# Altium PCB PCB1.PcbDoc (part 3 of 3)
Units mm, origin at the board's own origin, x right, y up, seen from the top; angles counter-clockwise.
Board outline 72 x 48 mm, 6 copper layers (SIG1, GND1, SIG2, PWR, GND2, SIG3), stack 0.816 mm thick; 134 components, 203 nets, 720 pads, 397 vias.
Unrouted connection lines stored in the file: 1.
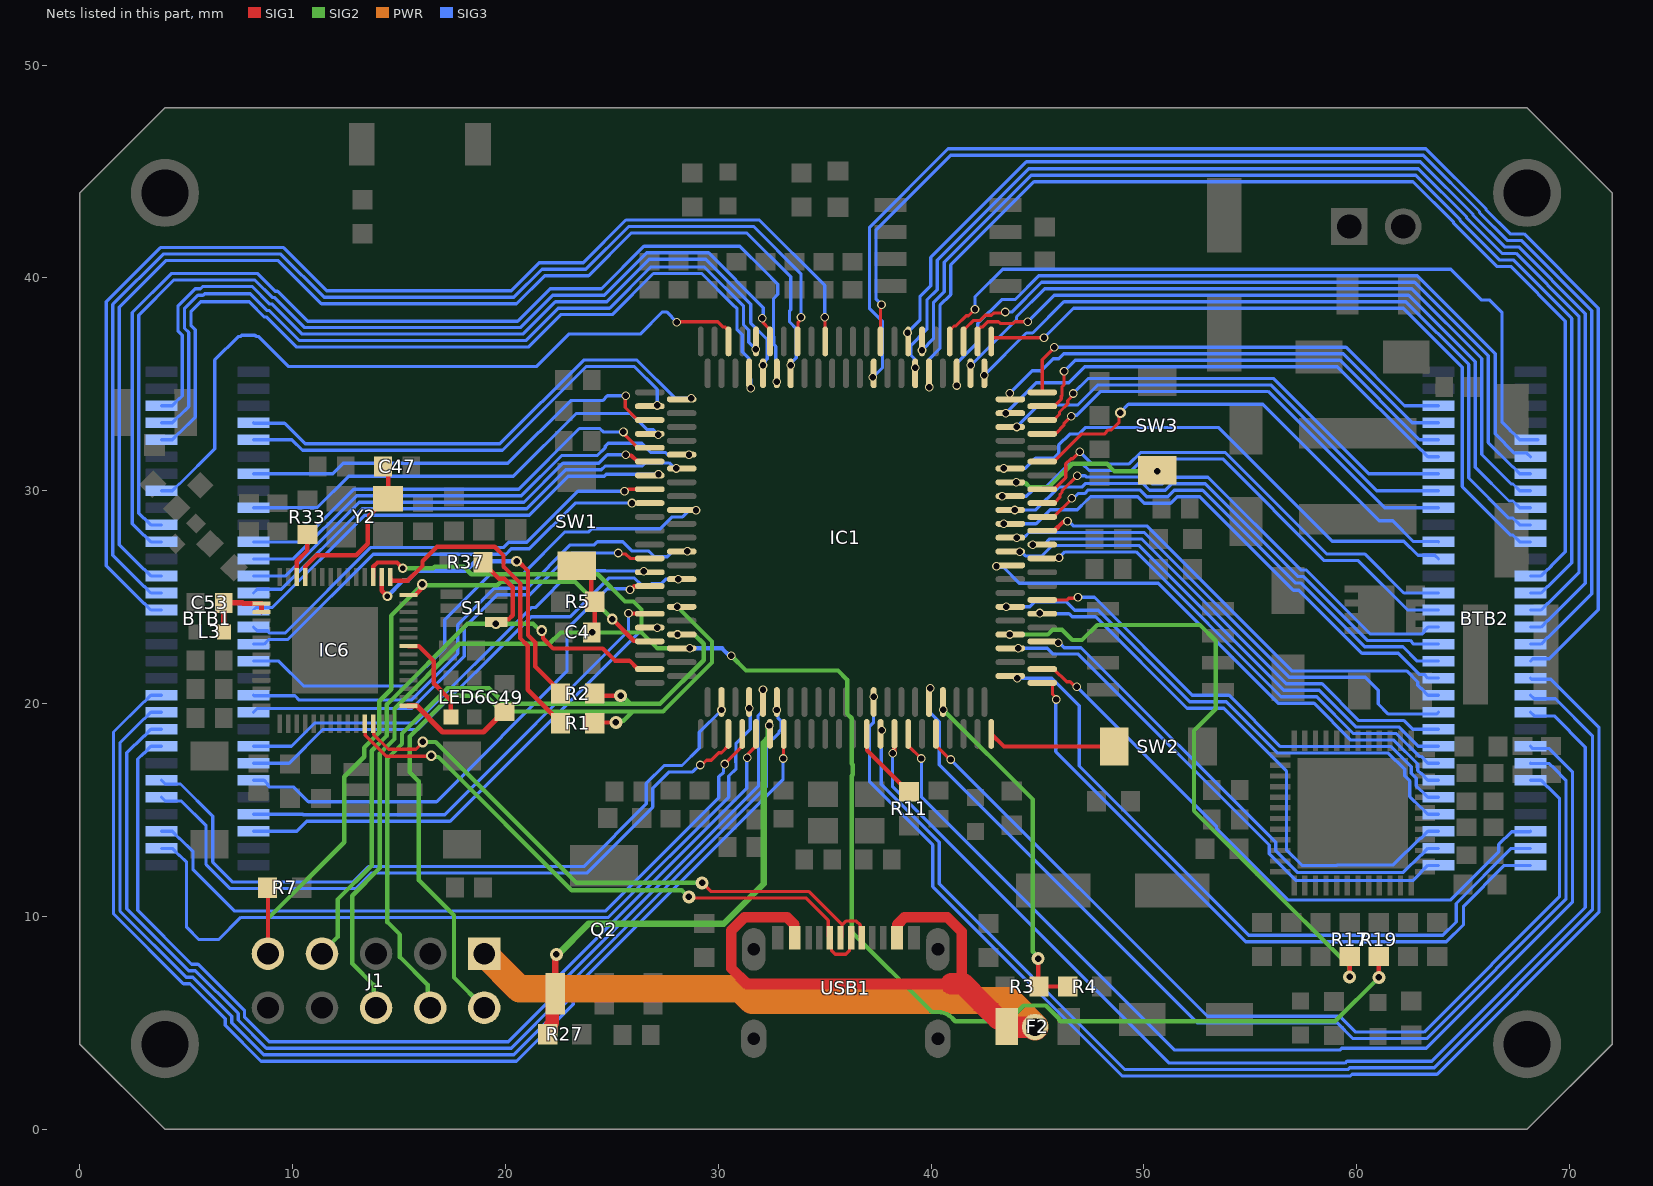
[diagram p7: the nets of this part, all layers, seen from the top]

## Via types
v1: diameter 0.406, hole 0.3, SIG1 to SIG3, 155 vias
v2: diameter 0.508, hole 0.305, SIG1 to SIG3, 119 vias
v3: diameter 0.813, hole 0.508, SIG1 to SIG3, 58 vias
v4: diameter 0.61, hole 0.305, SIG1 to SIG3, 33 vias
v5: diameter 0.914, hole 0.508, SIG1 to SIG3, 13 vias
v6: diameter 1.219, hole 0.813, SIG1 to SIG3, 5 vias
v7: diameter 1.219, hole 0.762, SIG1 to SIG3, 5 vias
v8: diameter 0.457, hole 0.254, SIG1 to SIG3, 4 vias
v9: diameter 1.2, hole 1.2, SIG1 to SIG3, 2 vias
v10: diameter 0.8, hole 0.8, SIG1 to SIG3, 2 vias
v11: diameter 0.508, hole 0.3, SIG1 to SIG3, 1 vias

## Nets (pads, with @x,y where several pads share a name; then routed paths per layer and width w, separated by ;. In a path a pad name is that pad's centre, name@x,y a point inside that pad or via, vN(x,y) a via of type N, cw(c..) or ccw(c..) an arc to the next point about the centre after c; other vN are vias at no path point) (continued)
PTB13: BTB1.43 IC1.116 | length 54.1
  SIG1 w0.203: IC1.116@33.4,35.52 v1(33.4,35.899)
  SIG3 w0.152: BTB1.43@3.84,26 3.34,26 3.019,26.321 2.995,26.321 1.854,27.463 1.854,38.633 4.041,40.819 9.32,40.819 11.354,38.786 20.52,38.786 21.842,40.108 23.904,40.108 25.911,42.115 31.343,42.115 33.401,40.056 33.401,38.511 33.35,38.46 33.35,37.931 33.661,37.62 33.661,36.673 33.659,36.671 33.659,36.255 33.4,35.996 v1(33.4,35.899)
PTB20: BTB2.1 IC1.44 | length 31.8
  SIG1 w0.152: IC1.44@45.22,20.975 45.645,20.975 45.704,20.916 45.704,20.447 45.884,20.267 v1(45.884,20.198)
  SIG3 w0.152: v1(45.884,20.198) 45.856,20.17 45.856,17.747 54.788,8.815 64.21,8.815 65.019,9.624 65.019,10.487 66.932,12.4 BTB2.1@68.16,12.4
PTB21: BTB2.2 IC1.45 | length 33.4
  SIG1 w0.203: IC1.45@43.72,21.3 44.052,21.3 v1(44.052,21.198)
  SIG3 w0.152: v1(44.052,21.198) 45.673,21.198 46.964,19.907 46.964,17.07 54.914,9.12 64.047,9.12 64.668,9.742 64.668,10.612 67.256,13.2 BTB2.2@68.16,13.2
PTB22: BTB2.49 IC1.67 | length 25.1
  SIG1 w0.203: v1(43.409,28.448) 43.411,28.45 IC1.67@43.72,28.45
  SIG3 w0.152: v1(43.409,28.448) 44.931,28.448 45.593,29.11 46.864,29.11 47.322,29.568 47.336,29.568 47.488,29.719 49.703,29.719 50.008,29.415 51.25,29.415 51.554,29.719 52.629,29.719 57.023,25.325 57.279,25.325 60.24,22.364 61.945,22.364 62.935,21.374 63.166,21.374 63.34,21.2 BTB2.49@63.84,21.2
PTB23: BTB2.47 IC1.69 | length 24
  SIG1 w0.203: IC1.69@43.72,29.1 43.722,29.102 v1(43.921,29.102)
  SIG3 w0.152: v1(43.921,29.102) 44.918,29.102 45.994,30.178 47.084,30.178 47.255,30.349 49.936,30.349 50.261,30.024 50.997,30.024 51.302,30.329 52.881,30.329 57.231,25.98 57.487,25.98 60.493,22.974 62.506,22.974 62.679,22.8 BTB2.47@63.84,22.8
PTB24: BTB2.46 IC1.70 | length 22.8
  SIG1 w0.152: IC1.70@45.22,29.425 45.262,29.467 45.822,29.467 46.052,29.697 46.052,29.826 46.149,29.922 46.149,29.997 v1(46.863,30.711)
  SIG3 w0.152: v1(46.863,30.711) 47.233,30.711 47.29,30.654 50.062,30.654 50.387,30.329 50.871,30.329 51.176,30.634 53.008,30.634 57.357,26.285 57.613,26.285 60.619,23.279 63.077,23.279 63.166,23.368 63.166,23.426 63.34,23.6 BTB2.46@63.84,23.6
PTB25: BTB2.44 IC1.72 | length 22.9
  SIG1 w0.152: IC1.72@45.22,30.075 45.262,30.117 45.822,30.117 46.33,30.625 46.33,31.264 46.576,31.511 46.66,31.511 v1(46.977,31.829)
  SIG3 w0.152: v1(46.977,31.829) 47.542,31.264 49.301,31.264 49.839,31.802 53.824,31.802 58.599,27.027 60.388,27.027 62.215,25.2 BTB2.44@63.84,25.2
PTB27: BTB2.42 IC1.75 | length 24.3
  SIG1 w0.203: v1(43.409,31.052) 43.411,31.05 IC1.75@43.72,31.05
  SIG3 w0.152: v1(43.409,31.052) 44.419,31.052 44.898,31.531 45.766,31.531 45.999,31.764 45.999,32.158 46.508,32.667 46.933,32.667 47.237,32.971 53.518,32.971 58.852,27.637 62.211,27.637 62.874,26.974 63.666,26.974 BTB2.42@63.84,26.8
PTB28: BTB2.41 IC1.76 | length 22.6
  SIG1 w0.152: IC1.76@45.22,31.375 45.765,31.375 47.057,32.667 48.134,32.667 48.33,32.864 48.474,32.864 48.829,33.218 48.829,33.604 v2(48.897,33.672)
  SIG3 w0.152: v2(48.897,33.672) 48.897,33.691 49.268,34.063 55.578,34.063 61.051,28.59 61.689,28.59 62.663,27.616 63.824,27.616 BTB2.41@63.84,27.6
PTB29: BTB2.39 IC1.80 | length 21.8
  SIG1 w0.152: IC1.80@45.22,32.675 45.815,32.675 45.878,32.739 45.896,32.739 46.24,33.082 46.24,33.159 v1(46.586,33.505)
  SIG3 w0.152: v1(46.586,33.505) 46.632,33.552 46.845,33.552 47.965,34.672 55.831,34.672 61.303,29.2 BTB2.39@63.84,29.2
PTC0: BTB2.54 IC1.62 | length 22.9
  SIG1 w0.203: IC1.62@45.22,26.825 45.232,26.837 45.994,26.837 v1(46.005,26.848)
  SIG3 w0.152: v1(46.005,26.848) 46.285,27.129 49.631,27.129 56.438,20.321 58.117,20.321 59.844,18.594 61.864,18.594 62.937,17.521 63.019,17.521 63.34,17.2 BTB2.54@63.84,17.2
PTC1: BTB2.55 IC1.61 | length 25.8
  SIG1 w0.203: v1(43.074,26.449) 43.124,26.5 IC1.61@43.72,26.5
  SIG3 w0.152: v1(43.074,26.449) 43.122,26.401 43.4,26.401 44.145,25.655 50.673,25.655 56.312,20.017 57.99,20.017 59.718,18.289 61.738,18.289 62.861,17.166 62.861,16.855 62.995,16.721 63.019,16.721 63.34,16.4 BTB2.55@63.84,16.4
PTC2: BTB2.59 IC1.50 | length 23.8
  SIG1 w0.203: IC1.50@45.22,22.925 45.235,22.91 45.864,22.91 45.913,22.861 v1(45.968,22.861)
  SIG3 w0.152: v1(45.968,22.861) 46.019,22.861 46.247,22.633 47.04,22.633 56.188,13.485 56.188,13.079 57.196,12.072 62.188,12.072 62.995,12.879 63.019,12.879 63.34,13.2 BTB2.59@63.84,13.2
PTC3: BTB2.60 IC1.49 | length 25.2
  SIG1 w0.203: IC1.49@43.72,22.6 44.087,22.6 44.089,22.602 v1(44.094,22.602)
  SIG3 w0.152: v1(44.094,22.602) 45.455,22.602 45.729,22.328 46.914,22.328 55.883,13.359 55.883,12.952 57.15,11.685 62.625,11.685 63.34,12.4 BTB2.60@63.84,12.4
PTC6: BTB1.17 IC1.141 | length 22.8
  SIG1 w0.203: v1(28.016,31.052) 28.233,31.052 28.235,31.05 IC1.141@28.28,31.05
  SIG3 w0.152: BTB1.17@8.16,25.2 8.334,25.374 9.473,25.374 13.26,29.161 20.998,29.161 22.827,30.989 24.51,30.989 24.687,31.167 26.437,31.167 26.582,31.311 27.688,31.311 27.947,31.052 v1(28.016,31.052)
PTC7: BTB1.18 IC1.140 | length 21.1
  SIG1 w0.203: v1(25.647,31.7) 25.686,31.661 25.913,31.661 26.199,31.375 IC1.140@26.78,31.375
  SIG3 w0.152: BTB1.18@8.16,26 9.668,26 13.133,29.465 20.872,29.465 22.701,31.294 24.383,31.294 24.79,31.7 v1(25.647,31.7)
PTC8: BTB2.16 IC1.98 | length 55.8
  SIG1 w0.203: IC1.98@39.25,35.52 39.25,35.695 39.252,35.697 v1(39.252,35.79)
  SIG3 w0.152: v1(39.252,35.79) 39.203,35.839 39.203,36.218 39.04,36.382 39.04,36.824 39.802,37.586 39.802,38.965 40.284,39.448 40.284,40.842 44.579,45.136 62.892,45.136 65.155,42.872 65.155,42.822 66.822,41.155 67.482,41.155 70.434,38.203 70.434,26.151 69.005,24.721 68.981,24.721 68.66,24.4 BTB2.16@68.16,24.4
PTC9: BTB2.17 IC1.97 | length 53
  SIG1 w0.152: v1(39.573,36.603) 39.575,36.605 IC1.97@39.575,37.02
  SIG3 w0.152: v1(39.573,36.603) 40.107,37.136 40.107,38.839 40.615,39.347 40.615,40.741 44.705,44.831 62.765,44.831 64.851,42.746 64.851,42.695 66.695,40.851 67.356,40.851 70.104,38.102 70.104,26.621 69.005,25.521 68.981,25.521 68.66,25.2 BTB2.17@68.16,25.2
PTC10: BTB2.25 IC1.92 | length 36.5
  SIG1 w0.203: IC1.92@41.2,35.52 41.2,34.976 41.202,34.974 v1(41.202,34.952)
  SIG3 w0.152: v1(41.202,34.952) 41.202,35.996 42.189,36.984 42.189,37.866 43.31,38.987 43.939,38.987 45.06,40.108 62.84,40.108 66.503,36.445 66.503,32.672 67.401,31.774 67.986,31.774 BTB2.25@68.16,31.6
PTC11: BTB2.23 IC1.90 | length 34.5
  SIG3 w0.152: v1(41.855,35.895) 41.872,35.895 44.012,38.034 44.012,38.17 45.34,39.498 62.586,39.498 65.867,36.218 65.867,31.708 67.253,30.321 67.339,30.321 67.66,30 BTB2.23@68.16,30
PTC12: BTB2.36 IC1.83 | length 23.2
  SIG1 w0.203: v1(43.51,33.648) 43.718,33.648 IC1.83@43.72,33.65
  SIG3 w0.152: v1(43.51,33.648) 44.941,35.079 46.467,35.079 47.217,35.829 59.087,35.829 62.995,31.921 63.019,31.921 63.34,31.6 BTB2.36@63.84,31.6
PTC13: BTB2.38 IC1.81 | length 23
  SIG1 w0.203: IC1.81@43.72,33 IC1.81@43.72,33 v1(44.018,33.002)
  SIG3 w0.152: v1(44.018,33.002) 45.055,34.038 46.9,34.038 47.839,34.977 55.957,34.977 60.934,30 BTB2.38@63.84,30
PTC14: BTB2.45 IC1.71 | length 24.8
  SIG1 w0.203: v1(43.332,29.748) 43.718,29.748 IC1.71@43.72,29.75
  SIG3 w0.152: v1(43.332,29.748) 44.478,29.748 44.741,30.011 45.224,30.011 46.458,31.244 47.13,31.244 47.416,30.959 49.427,30.959 49.966,31.497 53.698,31.497 58.473,26.722 60.077,26.722 62.399,24.4 BTB2.45@63.84,24.4
PTC15: BTB2.48 IC1.68 | length 22.7
  SIG1 w0.152: IC1.68@45.22,28.775 45.762,28.775 46.603,29.616 v1(46.603,29.643)
  SIG3 w0.152: v1(46.603,29.643) 46.672,29.643 46.901,29.873 47.21,29.873 47.382,30.044 49.809,30.044 50.134,29.719 51.123,29.719 51.428,30.024 52.755,30.024 57.104,25.675 57.361,25.675 60.367,22.669 62.171,22.669 62.84,22 BTB2.48@63.84,22
PTC16: BTB2.50 IC1.66 | length 22.3
  SIG1 w0.203: IC1.66@45.22,28.125 45.78,28.125 46.193,28.538 46.367,28.538 v1(46.406,28.576)
  SIG3 w0.152: v1(46.406,28.576) 46.444,28.576 46.671,28.349 50.138,28.349 56.947,21.541 62.337,21.541 62.861,21.017 62.861,20.855 62.995,20.721 63.019,20.721 63.34,20.4 BTB2.50@63.84,20.4
PTC17: BTB2.51 IC1.65 | length 24.2
  SIG1 w0.203: IC1.65@43.72,27.8 44.004,27.8 44.006,27.802 v1(44.018,27.802)
  SIG3 w0.152: v1(44.018,27.802) 44.067,27.851 44.406,27.851 44.598,28.043 50.01,28.043 56.817,21.236 60.401,21.236 61.011,20.626 61.011,19.983 61.485,19.509 63.749,19.509 BTB2.51@63.84,19.6
PTC18: BTB2.37 IC1.82 | length 21.5
  SIG1 w0.152: IC1.82@45.22,33.325 45.761,33.325 46.031,33.595 46.031,33.705 46.421,34.094 46.421,34.245 46.682,34.506 v1(46.682,34.575)
  SIG3 w0.152: v1(46.682,34.575) 46.688,34.575 47.395,35.282 56.083,35.282 60.565,30.8 BTB2.37@63.84,30.8
PTC19: BTB2.35 IC1.84 | length 21.7
  SIG1 w0.152: IC1.84@45.22,33.975 45.262,34.017 45.822,34.017 46.116,34.311 46.116,34.44 46.149,34.472 46.149,34.895 46.246,34.992 v1(46.246,35.612)
  SIG3 w0.152: v1(46.246,35.612) 46.768,36.134 59.214,36.134 62.944,32.404 63.836,32.404 BTB2.35@63.84,32.4
PTC20: BTB2.34 IC1.85 | length 22.6
  SIG1 w0.203: v1(43.687,34.579) 43.687,34.333 IC1.85@43.72,34.3
  SIG3 w0.152: v1(43.687,34.579) 44.754,35.646 45.17,35.646 45.734,36.21 46.003,36.21 46.232,36.439 59.372,36.439 62.611,33.2 BTB2.34@63.84,33.2
PTC21: BTB2.33 IC1.86 | length 21.5
  SIG1 w0.152: IC1.86@45.22,34.625 45.22,36.154 45.782,36.716 v1(45.782,36.744)
  SIG3 w0.152: v1(45.782,36.744) 59.498,36.744 62.242,34 BTB2.33@63.84,34
PTC23: BTB2.20 IC1.87 | length 33.9
  SIG1 w0.152: IC1.87@42.825,37.02 42.825,37.139 42.884,37.198 v1(45.303,37.198)
  SIG3 w0.152: v1(45.303,37.198) 46.689,38.584 62.179,38.584 64.952,35.811 64.952,30.198 67.228,27.921 67.339,27.921 67.66,27.6 BTB2.20@68.16,27.6
PTC24: BTB2.21 IC1.88 | length 34.7
  SIG1 w0.203: v1(42.494,35.434) 42.5,35.44 IC1.88@42.5,35.52
  SIG3 w0.152: v1(42.494,35.434) 44.475,37.416 44.766,37.416 46.239,38.889 62.306,38.889 65.257,35.937 65.257,30.604 67.14,28.721 67.339,28.721 67.66,28.4 BTB2.21@68.16,28.4
PTC25: BTB2.22 IC1.89 | length 34.3
  SIG1 w0.152: IC1.89@42.175,37.02 42.175,37.545 42.325,37.695 42.41,37.695 42.663,37.949 43.165,37.949 43.246,37.867 43.867,37.867 43.949,37.949 v1(44.545,37.949)
  SIG3 w0.152: v1(44.545,37.949) 45.79,39.194 62.432,39.194 65.562,36.064 65.562,31.112 67.152,29.521 67.339,29.521 67.66,29.2 BTB2.22@68.16,29.2
PTC26: BTB2.24 IC1.91 | length 34.2
  SIG1 w0.152: IC1.91@41.525,37.02 41.525,37.545 41.652,37.673 41.979,38 42.283,38 42.537,38.253 42.837,38.253 42.935,38.352 43.43,38.352 v1(43.479,38.401)
  SIG3 w0.152: v1(43.479,38.401) 43.784,38.401 45.187,39.803 62.713,39.803 66.171,36.344 66.171,32.265 67.315,31.121 67.339,31.121 67.66,30.8 BTB2.24@68.16,30.8
PTC27: BTB2.26 IC1.93 | length 36
  SIG1 w0.152: IC1.93@40.875,37.02 40.875,37.545 41.073,37.744 41.166,37.744 41.65,38.228 41.757,38.228 v1(42.062,38.533)
  SIG3 w0.152: v1(42.062,38.533) 42.062,39.117 43.358,40.413 64.414,40.413 65.867,38.96 66.244,38.96 66.819,38.385 66.819,33.241 67.181,32.879 67.181,32.855 67.315,32.721 67.339,32.721 67.66,32.4 BTB2.26@68.501,32.4
PTC28: BTB2.18 IC1.96 | length 52.4
  SIG3 w0.152: v1(39.903,34.876) 39.903,36.179 40.411,36.687 40.411,38.712 40.919,39.22 40.919,40.615 44.831,44.526 62.639,44.526 64.546,42.62 64.546,42.569 66.569,40.546 67.229,40.546 69.799,37.976 69.799,27.139 69.139,26.479 69.139,26.455 69.005,26.321 68.981,26.321 68.66,26 BTB2.18@68.16,26
PTC29: BTB2.15 IC1.99 | length 56.1
  SIG1 w0.152: v1(38.887,37.426) 38.887,37.142 38.925,37.104 IC1.99@38.925,37.02
  SIG3 w0.152: v1(38.887,37.426) 39.472,38.01 39.472,39.117 39.98,39.625 39.98,40.968 44.479,45.467 62.991,45.467 65.46,42.999 65.46,42.948 66.948,41.46 67.608,41.46 70.739,38.329 70.739,25.656 69.005,23.921 68.981,23.921 68.66,23.6 BTB2.15@68.16,23.6
PTC31: BTB2.14 IC1.103 | length 60.7
  SIG1 w0.152: IC1.103@37.625,37.02 37.625,38.703 v1(37.668,38.746)
  SIG3 w0.152: v1(37.668,38.746) 37.414,39 37.414,42.267 40.919,45.772 63.118,45.772 65.765,43.125 65.765,43.074 67.074,41.765 67.734,41.765 71.044,38.456 71.044,25.161 69.005,23.121 68.981,23.121 68.66,22.8 BTB2.14@68.16,22.8
PTD0: BTB1.59 IC1.8 | length 38
  SIG1 w0.203: IC1.8@31.45,19.783 IC1.8@31.45,19.882 ; IC1.8@31.45,20.08 IC1.8@31.45,19.882 ; v1(31.452,19.781) 31.452,19.88 IC1.8@31.45,19.882
  SIG3 w0.152: BTB1.59@3.84,13.2 4.34,13.2 4.661,12.879 4.685,12.879 5.019,12.544 5.019,9.494 5.594,8.919 6.53,8.919 7.569,9.958 24.84,9.958 30.493,15.611 30.493,16.6 30.836,16.943 30.836,17.219 30.825,17.23 30.825,17.672 30.836,17.683 30.836,18.137 31.496,18.797 31.496,19.737 v1(31.452,19.781)
PTD1: BTB1.58 IC1.7 | length 33.9
  SIG1 w0.152: v1(30.296,17.162) 30.296,17.174 31.125,18.004 IC1.7@31.125,18.58
  SIG3 w0.152: BTB1.58@3.84,14 4.34,14 4.661,13.679 4.685,13.679 5.324,13.039 5.324,12.189 7.25,10.263 24.713,10.263 30.023,15.572 30.023,16.562 30.247,16.786 30.247,17.113 v1(30.296,17.162)
PTD2: BTB1.34 IC1.121 | length 38.2
  SIG3 w0.152: BTB1.34@3.84,33.2 4.34,33.2 4.661,33.521 4.685,33.521 5.123,33.96 5.123,37.441 4.914,37.65 4.914,38.55 5.55,39.186 5.792,39.186 5.871,39.265 8.007,39.265 8.804,38.468 8.912,38.468 10.321,37.059 20.948,37.059 22.473,38.584 24.892,38.584 26.824,40.516 29.35,40.516 31.189,38.677 31.189,37.791 31.429,37.551 31.429,36.987 v1(31.756,36.659)
PTD3: BTB1.33 IC1.120 | length 39.7
  SIG1 w0.203: v1(32.098,35.898) 32.098,35.522 IC1.120@32.1,35.52
  SIG3 w0.152: BTB1.33@3.84,34 4.34,34 4.661,34.321 4.685,34.321 4.819,34.455 4.819,37.315 4.609,37.524 4.609,38.676 5.424,39.491 5.666,39.491 5.775,39.6 8.103,39.6 8.93,38.773 9.038,38.773 10.448,37.363 20.821,37.363 22.347,38.889 24.766,38.889 26.756,40.879 29.418,40.879 31.528,38.769 31.528,37.883 32.3,37.111 32.3,36.196 32.203,36.099 32.203,36.072 32.098,35.967 v1(32.098,35.898)
PTD4: BTB1.40 IC1.119 | length 45.8
  SIG1 w0.152: v1(32.061,38.104) 32.11,38.056 32.11,37.895 32.383,37.622 32.383,37.062 IC1.119@32.425,37.02
  SIG3 w0.152: BTB1.40@3.84,28.4 3.34,28.4 3.019,28.721 2.995,28.721 2.769,28.948 2.769,38.254 4.42,39.905 8.23,39.905 9.057,39.078 9.164,39.078 10.574,37.668 20.695,37.668 22.221,39.194 24.639,39.194 26.63,41.184 29.544,41.184 32.116,38.612 32.116,38.46 32.11,38.454 32.11,38.153 v1(32.061,38.104)
PTD8: BTB2.52 IC1.64 | length 23.1
  SIG1 w0.203: v1(44.782,27.473) IC1.64@45.06,27.473 ; IC1.64@45.218,27.473 IC1.64@45.22,27.475
  SIG3 w0.152: v1(44.782,27.473) 45.312,27.473 45.578,27.738 49.883,27.738 56.691,20.931 58.369,20.931 60.096,19.204 62.221,19.204 62.625,18.8 BTB2.52@63.84,18.8
PTD9: BTB2.53 IC1.63 | length 24.3
  SIG1 w0.203: IC1.63@43.72,27.15 43.725,27.145 v1(44.156,27.145)
  SIG3 w0.152: v1(44.156,27.145) 44.224,27.145 44.43,26.94 45.21,26.94 45.704,27.433 49.757,27.433 56.564,20.626 58.243,20.626 59.97,18.899 61.99,18.899 62.889,18 BTB2.53@63.84,18
PTD10: BTB2.56 IC1.56 | length 23
  SIG1 w0.152: IC1.56@45.22,24.875 46.391,24.875 46.467,24.951 46.855,24.951 v1(46.899,24.995)
  SIG3 w0.152: v1(46.899,24.995) 47.676,24.995 52.273,20.398 53.999,20.398 56.412,17.985 61.612,17.985 62.557,17.04 62.557,16.729 62.789,16.497 62.789,16.128 62.995,15.921 63.019,15.921 63.34,15.6 BTB2.56@63.84,15.6
PTD11: BTB2.57 IC1.55 | length 25.4
  SIG1 w0.203: v1(43.529,24.548) 43.718,24.548 IC1.55@43.72,24.55
  SIG3 w0.152: v1(43.529,24.548) 44.636,24.548 44.878,24.79 46.349,24.79 46.753,24.387 47.853,24.387 52.147,20.093 53.873,20.093 56.286,17.68 61.485,17.68 62.252,16.913 62.252,16.603 62.484,16.371 62.484,15.633 62.995,15.121 63.019,15.121 63.34,14.8 BTB2.57@63.84,14.8
PTD12: BTB2.58 IC1.54 | length 26.6
  SIG1 w0.203: v1(45.099,24.257) 45.131,24.225 IC1.54@45.22,24.225
  SIG3 w0.152: v1(45.099,24.257) 45.129,24.227 46.482,24.227 46.627,24.082 47.727,24.082 52.021,19.788 53.746,19.788 56.693,16.842 56.693,13.133 57.429,12.397 59.07,12.397 59.095,12.422 61.718,12.422 62.975,13.679 63.019,13.679 63.34,14 BTB2.58@63.84,14
PTD15: BTB2.6 IC1.35 | length 44.4
  SIG1 w0.152: IC1.35@40.225,18.58 40.225,18.055 40.905,17.375 v1(40.919,17.375)
  SIG3 w0.152: v1(40.919,17.375) 52.984,5.31 59.209,5.31 59.949,4.57 63.163,4.57 69.52,10.927 69.52,15.563 69.005,16.079 68.981,16.079 68.66,16.4 BTB2.6@68.16,16.4
PTD16: BTB2.7 IC1.34 | length 49.5
  SIG1 w0.203: IC1.34@39.9,20.08 39.9,20.667 v1(39.959,20.726)
  SIG3 w0.152: v1(39.959,20.726) 39.952,20.719 39.952,19.569 40.397,19.124 40.397,18.572 40.394,18.57 40.394,17.882 40.386,17.873 40.386,17.122 52.503,5.005 59.082,5.005 59.823,4.265 63.289,4.265 69.825,10.801 69.825,16.41 69.278,16.956 69.049,17.185 68.175,17.185 BTB2.7@68.16,17.2
PTD17: BTB2.8 IC1.31 | length 50.2
  SIG1 w0.152: IC1.31@38.925,18.58 38.925,18.03 39.532,17.424 v1(39.542,17.424)
  SIG3 w0.152: v1(39.542,17.424) 39.542,15.628 51.446,3.724 59.195,3.724 59.283,3.811 63.267,3.811 70.129,10.674 70.129,16.81 69.049,17.89 68.27,17.89 BTB2.8@68.16,18
PTD20: BTB1.45 IC1.111 | length 56.8
  SIG1 w0.152: v1(35.001,38.152) 35.013,38.14 35.013,37.032 IC1.111@35.025,37.02
  SIG3 w0.152: BTB1.45@3.84,24.4 3.34,24.4 3.019,24.721 2.995,24.721 1.245,26.472 1.245,38.885 3.788,41.429 9.575,41.429 11.609,39.395 20.267,39.395 21.589,40.718 23.652,40.718 25.658,42.724 31.929,42.724 35.001,39.652 v1(35.001,38.152)
PTD21: BTB1.44 IC1.115 | length 54.5
  SIG1 w0.152: IC1.115@33.725,37.02 33.749,37.044 33.749,37.922 33.884,38.056 v1(33.884,38.152)
  SIG3 w0.152: BTB1.44@3.84,25.2 3.34,25.2 3.019,25.521 2.995,25.521 1.549,26.967 1.549,38.759 3.915,41.124 9.449,41.124 11.482,39.091 20.393,39.091 21.716,40.413 23.778,40.413 25.785,42.419 31.662,42.419 33.884,40.198 v1(33.884,38.152)
PTD22: BTB1.41 IC1.118 | length 51
  SIG1 w0.203: v1(32.748,35.12) 32.75,35.122 IC1.118@32.75,35.52
  SIG3 w0.152: BTB1.41@3.84,27.6 3.34,27.6 3.019,27.921 2.995,27.921 2.464,28.453 2.464,38.38 4.293,40.21 8.356,40.21 9.183,39.383 9.291,39.383 10.7,37.973 20.569,37.973 22.094,39.498 24.513,39.498 26.504,41.489 31.018,41.489 32.17,40.337 32.791,39.715 32.791,39.231 32.594,39.034 32.594,37.248 32.605,37.237 32.605,36.881 32.699,36.786 32.699,35.169 v1(32.748,35.12)
PTD23: BTB1.35 IC1.122 | length 40.7
  SIG1 w0.203: IC1.122@31.45,35.52 31.45,34.939 31.521,34.868 v1(31.521,34.813)
  SIG3 w0.152: BTB1.35@3.84,32.4 4.34,32.4 4.661,32.721 4.685,32.721 5.428,33.465 5.428,37.567 5.219,37.777 5.219,38.423 5.677,38.881 7.96,38.881 8.678,38.163 8.786,38.163 10.195,36.754 21.074,36.754 22.599,38.279 25.018,38.279 26.951,40.212 29.219,40.212 30.661,38.769 30.665,38.769 30.884,38.551 30.884,37.571 31.124,37.331 31.124,36.537 31.448,36.213 31.448,35.321 31.521,35.248 v1(31.521,34.813)
PTD24: BTB1.38 IC1.125 | length 34.7
  SIG1 w0.152: v1(28.046,37.928) 28.067,37.949 29.978,37.949 30.231,37.696 30.325,37.696 30.475,37.545 IC1.125@30.475,37.02
  SIG3 w0.152: BTB1.38@3.84,30 4.34,30 4.661,30.321 4.685,30.321 6.343,31.979 6.343,36.153 7.439,37.249 7.547,37.249 7.612,37.314 8.234,37.314 8.299,37.249 8.407,37.249 9.816,35.839 21.453,35.839 22.978,37.365 26.337,37.365 27.379,38.406 27.568,38.406 v1(28.046,37.928)
PTD26: BTB1.27 IC1.131 | length 23.8
  SIG1 w0.203: IC1.131@28.28,34.3 28.692,34.3 28.727,34.335 v1(28.727,34.353)
  SIG3 w0.152: BTB1.27@8.16,33.2 8.181,33.179 9.621,33.179 10.591,32.209 19.736,32.209 23.673,36.146 26.179,36.146 27.972,34.353 v1(28.727,34.353)
PTD27: BTB1.26 IC1.132 | length 22.4
  SIG1 w0.152: IC1.132@26.78,33.975 27.141,33.975 27.127,33.989 v1(27.127,34.012)
  SIG3 w0.152: BTB1.26@8.16,32.4 9.969,32.4 10.465,31.904 19.862,31.904 23.799,35.841 26.053,35.841 27.127,34.766 v1(27.127,34.012)
PTD28: BTB1.24 IC1.134 | length 21
  SIG1 w0.152: v1(25.643,34.469) 25.629,34.454 25.629,33.916 26.178,33.367 26.738,33.367 IC1.134@26.78,33.325
  SIG3 w0.152: BTB1.24@8.16,30.8 11.882,30.8 12.376,31.294 20.115,31.294 23.061,34.241 24.561,34.241 24.79,34.469 v1(25.643,34.469)
PTD29: BTB1.22 IC1.136 | length 21.7
  SIG1 w0.203: IC1.136@26.78,32.675 26.815,32.64 v1(27.178,32.64)
  SIG3 w0.152: BTB1.22@8.16,29.2 11.144,29.2 12.628,30.685 20.367,30.685 23.313,33.631 25.892,33.631 26.654,32.869 26.949,32.869 v1(27.178,32.64)
PTD30: BTB1.20 IC1.138 | length 21.2
  SIG1 w0.152: v1(25.543,32.767) 25.543,32.702 26.22,32.025 IC1.138@26.78,32.025
  SIG3 w0.152: BTB1.20@8.16,27.6 10.406,27.6 12.881,30.075 20.62,30.075 23.473,32.929 24.425,32.929 24.586,32.767 v1(25.543,32.767)
PTD31: BTB1.19 IC1.139 | length 23
  SIG3 w0.152: BTB1.19@8.16,26.8 10.037,26.8 13.007,29.77 20.746,29.77 22.634,31.659 24.317,31.659 24.689,32.031 24.689,32.098 24.825,32.234 26.399,32.234 26.831,31.802 27.525,31.802 27.625,31.702 v1(28.626,31.702)
PTE1: BTB1.4 IC1.162 | length 23
  SIG1 w0.203: v1(25.781,24.242) 25.789,24.233 26.772,24.233 IC1.162@26.78,24.225
  SIG3 w0.152: BTB1.4@8.16,14.8 10.475,14.8 10.491,14.784 17.144,14.784 25.781,23.421 v1(25.781,24.242)
PTE2: BTB1.13 IC1.147 | length 25.5
  SIG3 w0.152: BTB1.13@8.16,22 9.345,22 10.516,20.829 15.367,20.829 17.145,22.607 17.145,23.952 19.3,26.107 20.835,26.107 22.796,28.068 23.915,28.068 24.067,28.221 27.28,28.221 27.832,28.773 28.321,28.773 28.581,29.033 28.904,29.033 v1(28.952,29.082)
PTE3: BTB2.11 IC1.27 | length 57.9
  SIG1 w0.203: IC1.27@37.625,18.58 37.625,18.722 37.66,18.757 v1(37.678,18.757)
  SIG3 w0.152: v1(37.678,18.757) 37.657,18.737 37.657,16.217 40.386,13.488 40.386,11.533 49.11,2.809 59.574,2.809 59.662,2.897 63.645,2.897 71.069,10.321 71.069,18.493 69.336,20.226 68.334,20.226 BTB2.11@68.16,20.4
PTE4: BTB1.50 IC1.13 | length 54.1
  SIG1 w0.152: v1(33.045,17.426) 33.06,17.441 33.06,18.565 IC1.13@33.075,18.58
  SIG3 w0.152: BTB1.50@3.84,20.4 3.34,20.4 3.019,20.079 2.995,20.079 1.584,18.668 1.584,10.129 4.869,6.845 5.178,6.845 6.83,5.193 6.83,4.884 8.514,3.199 12.029,3.199 12.03,3.2 20.52,3.2 23.19,5.871 23.19,6.584 33.045,16.44 v1(33.045,17.426)
PTE5: BTB1.51 IC1.12 | length 53.8
  SIG1 w0.203: IC1.12@32.75,20.08 32.752,20.078 v1(32.752,19.702)
  SIG3 w0.152: BTB1.51@3.84,19.6 3.34,19.6 3.019,19.279 2.995,19.279 1.889,18.172 1.889,10.256 4.995,7.149 5.305,7.149 7.134,5.32 7.134,5.01 8.641,3.504 11.903,3.504 11.904,3.505 20.393,3.505 22.885,5.997 22.885,6.711 32.261,16.086 32.261,18.041 32.855,18.635 32.855,18.703 32.958,18.806 32.958,19.18 32.801,19.338 32.801,19.653 v1(32.752,19.702)
PTE6: BTB1.14 IC1.146 | length 21.4
  SIG1 w0.152: v1(25.945,29.425) IC1.146@26.78,29.425
  SIG3 w0.152: BTB1.14@8.16,22.8 8.66,22.8 8.874,23.014 9.767,23.014 13.778,27.025 20.026,27.025 20.277,27.275 21.126,27.275 23.276,29.425 v1(25.945,29.425)
PTE7: BTB2.13 IC1.104 | length 65
  SIG1 w0.203: v1(37.256,35.333) 37.3,35.377 IC1.104@37.3,35.52
  SIG3 w0.152: v1(37.256,35.333) 37.719,35.796 37.719,37.941 37.109,38.551 37.109,42.393 40.793,46.077 63.244,46.077 66.07,43.251 66.07,43.2 67.2,42.07 67.861,42.07 71.349,38.583 71.349,24.411 69.049,22.112 68.272,22.112 BTB2.13@68.16,22
PTE8: BTB2.3 IC1.46 | length 29
  SIG1 w0.152: IC1.46@45.22,21.625 45.768,21.625 46.363,21.03 46.527,21.03 46.77,20.787 v1(46.839,20.787)
  SIG3 w0.152: v1(46.839,20.787) 53.41,14.215 53.41,14.132 56.771,10.771 64.396,10.771 66.675,13.05 66.675,13.387 67.271,13.983 68.143,13.983 BTB2.3@68.16,14
PTE10: BTB1.52 IC1.10 | length 52.7
  SIG1 w0.203: v1(32.098,20.652) 32.098,20.082 IC1.10@32.1,20.08
  SIG3 w0.152: BTB1.52@3.84,18.8 3.34,18.8 3.019,18.479 2.995,18.479 2.21,17.693 2.21,10.366 5.122,7.454 5.431,7.454 7.439,5.446 7.439,5.137 8.767,3.809 11.777,3.809 11.778,3.81 20.267,3.81 22.581,6.124 22.581,6.837 31.892,16.148 31.892,17.892 31.864,17.92 31.864,19.439 32.098,19.673 v1(32.098,20.652)
PTE11: BTB1.53 IC1.9 | length 47.9
  SIG1 w0.152: v1(31.358,17.451) 31.407,17.5 31.407,17.652 31.775,18.02 IC1.9@31.775,18.58
  SIG3 w0.152: BTB1.53@3.84,18 3.34,18 3.019,17.679 2.995,17.679 2.718,17.401 2.718,10.289 5.248,7.759 5.557,7.759 7.744,5.572 7.744,5.263 8.893,4.114 10.874,4.114 10.875,4.115 20.141,4.115 22.276,6.25 22.276,6.963 31.337,16.025 31.337,17.43 v1(31.358,17.451)
PTE12: BTB2.10 IC1.29 | length 54.3
  SIG1 w0.203: v1(38.191,17.666) 38.191,17.721 38.26,17.79 38.26,18.565 IC1.29@38.275,18.58
  SIG3 w0.152: v1(38.191,17.666) 38.182,17.658 38.182,16.123 51.191,3.114 59.448,3.114 59.535,3.202 63.519,3.202 70.739,10.422 70.739,17.959 69.272,19.426 68.334,19.426 BTB2.10@68.16,19.6
PTE14: BTB2.12 IC1.26 | length 61.5
  SIG1 w0.203: v1(37.298,20.321) 37.298,20.082 IC1.26@37.3,20.08
  SIG3 w0.152: v1(37.298,20.321) 37.298,19.132 37.109,18.943 37.109,16.334 40.081,13.362 40.081,11.407 48.983,2.505 59.7,2.505 59.788,2.592 63.772,2.592 71.374,10.195 71.374,18.899 69.121,21.152 68.208,21.152 BTB2.12@68.16,21.2
PTE15: BTB1.56 IC1.5 | length 33.3
  SIG1 w0.152: v1(29.149,17.118) 29.218,17.118 29.447,17.347 29.673,17.347 30.022,17.696 30.151,17.696 30.475,18.02 IC1.5@30.475,18.58
  SIG3 w0.152: BTB1.56@3.84,15.6 4.014,15.426 4.768,15.426 5.933,14.261 5.933,12.441 7.063,11.312 12.96,11.312 13.689,12.041 23.825,12.041 26.924,15.14 26.924,16.029 27.686,16.791 28.793,16.791 29.121,17.118 v1(29.149,17.118)
PTE16: BTB1.55 IC1.4 | length 34
  SIG1 w0.203: IC1.4@30.148,19.839 30.148,19.703 v1(30.15,19.701) ; IC1.4@30.148,20.078 IC1.4@30.15,20.08
  SIG3 w0.152: BTB1.55@3.84,16.4 4.014,16.226 4.73,16.226 6.248,14.708 6.248,12.557 7.189,11.617 12.834,11.617 13.563,12.346 23.673,12.346 26.619,15.292 26.619,16.254 27.461,17.096 28.296,17.096 29.108,17.908 29.108,18.659 v1(30.15,19.701)
PTE17: BTB1.16 IC1.142 | length 22.1
  SIG1 w0.152: IC1.142@26.78,30.725 27.066,30.725 27.119,30.778 v1(27.188,30.778)
  SIG3 w0.152: BTB1.16@8.16,24.4 8.279,24.519 9.049,24.519 13.386,28.856 21.125,28.856 22.953,30.685 24.636,30.685 24.734,30.783 27.183,30.783 v1(27.188,30.778)
PTE18: BTB1.15 IC1.144 | length 21.5
  SIG1 w0.152: v1(25.594,29.984) 25.662,29.984 25.753,30.075 IC1.144@26.78,30.075
  SIG3 w0.152: BTB1.15@8.16,23.6 8.334,23.426 8.834,23.426 8.834,23.408 8.923,23.319 9.641,23.319 13.654,27.332 19.902,27.332 20.151,27.58 21,27.58 23.404,29.984 v1(25.594,29.984)
PTE21: BTB1.11 IC1.153 | length 25
  SIG1 w0.203: IC1.153@28.28,27.15 28.542,27.15 v1(28.55,27.158)
  SIG3 w0.152: BTB1.11@8.16,20.4 8.188,20.372 10.111,20.372 10.314,20.169 15.569,20.169 17.755,22.355 17.755,23.7 19.482,25.427 21.017,25.427 23.049,27.459 24.167,27.459 24.32,27.611 25.515,27.611 25.958,27.168 26.735,27.168 26.837,27.066 27.001,26.902 27.6,26.902 27.856,27.158 v1(28.55,27.158)
PTE22: BTB1.10 IC1.154 | length 22.4
  SIG1 w0.152: v1(25.295,27.078) 25.343,27.029 25.656,27.029 25.861,26.825 IC1.154@26.78,26.825
  SIG3 w0.152: BTB1.10@8.16,19.6 8.334,19.774 15.605,19.774 18.059,22.229 18.059,23.573 19.608,25.122 21.143,25.122 23.099,27.078 v1@25.131,27.078
PTE23: BTB1.8 IC1.156 | length 22.1
  SIG1 w0.203: v1(26.49,26.228) 26.543,26.175 IC1.156@26.78,26.175
  SIG3 w0.152: BTB1.8@8.16,18 9.947,18 11.038,19.091 15.784,19.091 21.205,24.512 21.396,24.512 23.123,26.24 24.702,26.24 24.714,26.228 v1(26.49,26.228)
PTE24: BTB1.7 IC1.157 | length 24
  SIG1 w0.203: v1(28.118,25.852) 28.124,25.852 28.126,25.85 IC1.157@28.28,25.85
  SIG3 w0.152: BTB1.7@8.16,17.2 9.833,17.2 11.419,18.786 15.91,18.786 21.205,24.081 23.038,24.081 24.857,25.899 26.064,25.899 26.374,25.589 26.816,25.589 26.867,25.64 27.323,25.64 27.535,25.852 v1(28.118,25.852)
PTE25: BTB1.6 IC1.158 | length 24.5
  SIG1 w0.203: v1(25.85,25.359) 25.905,25.359 26.056,25.51 26.765,25.51 IC1.158@26.78,25.525
  SIG3 w0.152: BTB1.6@8.16,16.4 8.66,16.4 8.834,16.226 8.834,16.168 8.923,16.079 10.059,16.079 10.743,15.394 16.764,15.394 22.885,21.515 22.885,23.496 24.79,25.401 25.808,25.401 v1(25.85,25.359)
PTE26: BTB1.3 IC1.164 | length 22.9
  SIG3 w0.152: BTB1.3@8.16,14 10.189,14 10.668,14.479 17.399,14.479 26.493,23.573 v1(27.127,23.573)
RESET: C4.2 IC1.167 IC6.45 J1.6 R5.1 R19.1 SW1.2 | length 99
  SIG1 w0.203: IC6.45@13.789,25.956 13.79,25.957 13.79,26.442 13.984,26.635 14.905,26.635 15.171,26.368 v8(15.171,26.367) ; SW1.2@23.445,26.476 23.455,26.476 24.028,25.903 24.028,24.957 R5.1@24.193,24.792 24.193,23.484 C4.2@24.053,23.344 v2(24.079,23.344) ; IC1.167@28.28,22.6 28.663,22.6 v1(28.665,22.598) ; v4(61.036,7.139) R19.1@61.036,8.041
  SIG2 w0.203: J1.6@13.919,5.716 13.805,5.831 13.805,6.786 12.799,7.792 12.799,10.976 14.097,12.275 14.097,17.654 14.783,18.34 14.783,19.763 17.831,22.811 22.061,22.811 22.594,23.344 v2(24.079,23.344) 26.392,23.344 ; v8(15.171,26.367) 16.6,26.367 16.674,26.441 18.034,26.441 18.393,26.081 24.337,26.081 25.618,24.8 26.012,24.8 26.392,24.42 26.392,23.344 ; v1(28.665,22.598) 27.138,22.598 26.392,23.344 ; v1(30.607,22.252) 31.302,21.557 35.624,21.557 36.063,21.117 36.063,19.521 36.271,19.313 36.271,17.175 36.318,17.128 36.318,16.665 36.271,16.617 36.271,9.272 39.988,5.556 40.032,5.511 40.317,5.511 cw(c40.317,4.556) 41.066,5.149 41.134,5.081 43.612,5.081 44.348,5.818 45.383,5.818 46.007,5.194 46.007,5.141 46.067,5.081 58.979,5.081 v4(61.036,7.139)
  SIG3 w0.203: v1(28.665,22.598) 30.178,22.598 30.525,22.252 v1(30.607,22.252)
SW0_PTB19: IC1.43 SW2.1 | length 5.5
  SIG1 w0.203: IC1.43@42.825,18.58 43.42,17.985 SW2.1@48.039,17.985
SW1_PTB26: IC1.73 SW3.1 | length 7.7
  SIG1 w0.203: IC1.73@43.72,30.4 43.722,30.398 v1(43.993,30.398) ; SW3.1@50.622,30.819 50.622,30.907 v2(50.629,30.913)
  SIG2 w0.203: v1(43.993,30.398) 44.032,30.359 44.442,30.359 44.625,30.177 45.538,30.177 46.632,31.27 48.259,31.27 48.616,30.913 v2(50.629,30.913)
SWD_TDI: IC6.44 R2.2 | length 14.8
  SIG1 w0.203: IC6.44@14.189,25.956 14.189,25.31 v8(14.453,25.046) ; v2(20.519,26.691) 20.6,26.691 21.057,26.234 21.057,23.215 21.4,22.872 21.4,21.743 22.593,20.55 R2.2@22.593,20.525
  SIG3 w0.203: v8(14.453,25.046) 15.189,25.782 15.413,25.782 15.871,26.24 18.136,26.24 18.591,26.695 20.515,26.695 v2(20.519,26.691)
SWD_TDO: IC6.43 R1.2 | length 15.4
  SIG1 w0.203: IC6.43@14.589,25.956 14.589,25.784 14.59,25.782 15.413,25.782 16.1,26.469 16.1,26.688 16.787,27.375 19.498,27.375 19.909,26.963 19.909,26.438 20.701,25.646 20.701,23.068 21.044,22.725 21.044,20.651 22.593,19.102 R1.2@22.593,19.077
TCK/CLK: IC1.166 IC6.42 J1.9 R7.2 | length 36.3
  SIG1 w0.203: R7.2@8.827,11.355 8.839,11.343 J1.9@8.839,8.256 ; IC6.42@15.439,25.106 15.761,25.106 16.034,25.379 16.034,25.541 v2(16.093,25.599) ; v2(25.018,23.973) 26.032,22.959 26.131,22.959 26.151,22.94 26.765,22.94 IC1.166@26.78,22.925
  SIG2 w0.203: J1.9@8.839,8.256 8.839,9.907 12.421,13.489 12.421,16.562 13.36,17.502 13.36,17.934 14.072,18.645 14.072,20.118 14.63,20.677 14.63,24.137 v2(16.093,25.599) ; v2@16.159,25.533 16.187,25.561 19.619,25.561 19.783,25.726 23.265,25.726 v2(25.018,23.973)
TDI: IC1.165 J1.4 R2.1 | length 34.5
  SIG1 w0.203: R2.1@24.193,20.474 24.295,20.372 v4(25.405,20.372) ; v1(28.082,23.248) 28.278,23.248 IC1.165@28.28,23.25
  SIG2 w0.203: J1.4@16.459,5.716 16.345,5.831 16.345,6.786 15.04,8.091 15.04,9.147 14.453,9.735 14.453,17.426 15.138,18.112 15.138,18.594 17.272,20.728 19.228,20.728 19.964,19.991 25.872,19.991 ; v4(25.405,20.372) 25.491,20.372 25.872,19.991 ; v1(28.082,23.248) 28.086,23.252 28.873,23.252 29.312,22.813 29.312,22.043 27.259,19.991 25.872,19.991
TDO: IC1.161 J1.2 R1.1 | length 36
  SIG1 w0.203: R1.1@24.193,19.077 24.235,19.118 v4(25.191,19.118) ; v1(28.076,24.552) 28.078,24.55 IC1.161@28.28,24.55
  SIG2 w0.203: J1.2@18.999,5.716 17.58,7.136 17.58,10.057 15.927,11.709 15.927,16.347 15.501,16.773 15.501,18.454 17.419,20.372 19.081,20.372 19.817,19.636 25.984,19.636 ; v4(25.191,19.118) 25.269,19.196 25.544,19.196 25.984,19.636 ; v1@28.082,24.546 29.706,22.922 29.706,21.935 27.407,19.636 25.984,19.636
TMS/DIO: IC1.170 J1.7 R37.2 S1.4 | length 32.1
  SIG1 w0.203: R37.2@18.942,26.646 18.942,26.621 19.693,25.87 19.943,25.87 20.346,25.467 20.346,24.157 20.149,23.96 19.69,23.96 S1.4@19.567,23.837 19.567,23.772 v2(19.549,23.754) ; v2(21.702,23.432) 21.761,23.373 21.761,23.073 22.238,22.595 24.574,22.595 25.145,22.023 25.822,22.023 26.22,21.625 IC1.170@26.78,21.625
  SIG2 w0.203: J1.7@11.379,8.256 11.379,8.299 12.114,9.034 12.114,10.795 13.716,12.397 13.716,17.787 14.427,18.498 14.427,19.966 18.215,23.754 v2@19.583,23.754 ; v2@19.632,23.803 19.681,23.754 21.297,23.754 21.62,23.432 v2(21.702,23.432)
USB_DN: IC6.25 USB1.5 USB1.7 | length 29
  SIG1 w0.152: IC6.25@13.39,19.054 13.413,19.032 13.413,18.517 14.403,17.527 16.485,17.527 v2(16.51,17.553) ; v4(28.613,10.923) 28.664,10.873 34.112,10.873 35.168,9.817 35.168,9.08 USB1.5@35.242,9.006 35.316,8.932 35.316,8.409 35.497,8.227 35.986,8.227 36.168,8.409 36.168,8.932 USB1.7@36.193,8.957
  SIG1 w0.203: IC6.25@13.389,19.056 IC6.25@13.39,19.054 ; USB1.7@36.193,8.957 USB1.7@36.242,9.006
  SIG2 w0.203: v2(16.51,17.553) 16.568,17.494 16.848,17.494 23.114,11.228 28.29,11.228 28.595,10.923 v4(28.613,10.923)
USB_DP: IC6.26 USB1.6 USB1.8 | length 28.8
  SIG1 w0.152: IC6.26@13.789,19.056 13.813,19.032 13.813,18.548 14.503,17.858 15.797,17.858 16.111,18.172 v2(16.111,18.202) ; v4(29.235,11.584) 29.642,11.177 34.241,11.177 35.816,9.603 ; USB1.6@35.742,9.006 35.816,9.08 35.816,9.603 ; USB1.8@36.693,9.054 36.668,9.08 36.668,9.603 36.487,9.784 35.997,9.784 35.816,9.603
  SIG1 w0.203: USB1.8@36.693,9.054 USB1.8@36.742,9.006
  SIG2 w0.203: v2(16.111,18.202) 16.723,18.202 23.341,11.584 v4(29.235,11.584)
USB_SIG_PTE9: IC1.36 R3.2 R4.1 | length 16.6
  SIG1 w0.203: IC1.36@40.55,20.08 40.564,20.066 v1(40.564,19.712) ; v4(45.03,8.023) 45.03,6.75 R3.2@45.072,6.707 R4.1@46.419,6.707
  SIG2 w0.203: v1(40.564,19.712) 44.78,15.495 44.78,8.346 45.03,8.096 v4(45.03,8.023)
VBUS: F2.1 J1.1 USB1.2 USB1.11 | length 55.2
  SIG1 w0.508: USB1.2@33.592,9.006 33.592,9.281 33.571,9.302 33.571,9.626 33.233,9.964 31.229,9.964 30.609,9.344 30.609,7.568 31.343,6.834 40.899,6.834 ; USB1.11@38.392,9.006 38.392,9.281 38.413,9.302 38.413,9.627 38.75,9.964 40.755,9.964 41.436,9.283 41.436,6.832
  SIG1 w1.016: 40.949,6.832 41.436,6.832 41.505,6.832 42.362,5.976 42.362,5.958 42.749,5.572 42.766,5.572 43.143,5.194 43.542,5.194 43.542,4.849 43.576,4.815 43.576,4.802 v6(44.882,4.802)
  PWR w1.27: J1.1@18.999,8.256 20.65,6.605 31.032,6.605 31.593,6.045 43.664,6.045 44.882,4.827 v6(44.882,4.802)
VDD_3P3: C53.2 IC6.2 IC6.3 L3.2 | length 3.6
  SIG1 w0.254: L3.2@6.771,23.369 6.771,24.726 C53.2@6.756,24.741 7.635,24.741 7.67,24.706 IC6.2@8.539,24.706 IC6.3@8.539,24.306
VDD_SPI: C49.2 IC6.29 | length 5.4
  SIG1 w0.254: IC6.29@15.439,19.906 15.813,19.906 17.049,18.67 18.969,18.67 19.909,19.611 C49.2@19.964,19.611
VRC_CTRL: IC1.11 Q2.1 R27.1 | length 22.6
  SIG1 w0.305: Q2.1@22.338,6.374 22.338,8.165 v4(22.391,8.218)
  SIG1 w0.635: R27.1@21.984,4.472 22.116,4.604 22.116,4.909 22.209,5.001 22.209,6.245 Q2.1@22.338,6.374
  SIG2 w0.305: v4(22.391,8.218) 22.466,8.218 23.901,9.653 30.251,9.653 32.131,11.533 32.131,18.163 32.378,18.41 32.378,18.956 v1(32.397,18.976)
WDI_TLF35584_PTD7: IC1.51 R17.1 | length 30.7
  SIG1 w0.152: v1(43.697,23.252) 43.699,23.25 IC1.51@43.72,23.25
  SIG1 w0.203: v4(59.665,7.164) R17.1@59.665,8.041
  SIG2 w0.203: v1(43.697,23.252) 45.485,23.252 45.704,23.471 46.149,23.471 46.632,22.988 47.092,22.988 47.803,23.7 52.633,23.7 53.375,22.957 53.375,19.75 52.35,18.725 52.35,14.961 55.296,12.016 55.355,11.956 59.665,7.647 v4(59.665,7.164)
WS2812_CTRL: IC6.36 LED6.3 | length 4.4
  SIG1 w0.203: IC6.36@15.439,22.706 15.44,22.704 15.925,22.704 16.629,22 16.629,20.956 17.433,20.152 LED6.3@17.433,19.381
XTAL: IC1.25 R11.1 | length 3.6
  SIG1 w0.203: IC1.25@36.975,18.58 36.99,18.565 36.99,17.813 38.939,15.864 R11.1@38.964,15.864
XTAL_N: C47.2 IC6.53 Y2.3 | length 8
  SIG1 w0.203: IC6.53@10.589,25.956 10.59,25.957 10.59,26.442 11.125,26.977 12.992,26.977 13.527,27.512 13.527,28.63 13.595,28.698 13.595,28.839 14.386,29.63 Y2.3@14.486,29.63 14.486,30.906 C47.2@14.25,31.142
XTAL_P: IC6.54 R33.1 | length 2.2
  SIG1 w0.203: IC6.54@10.189,25.956 10.189,26.689 10.693,27.194 R33.1@10.693,27.954
pads on no net: BTB1.32 BTB2.28 IC2.10 IC2.11 IC2.19 IC2.20 IC2.21 IC2.26 IC2.29 IC2.32 IC2.33 IC6.6 IC6.7 IC6.8 IC6.9 IC6.10 IC6.11 IC6.12 IC6.13 IC6.14 IC6.15 IC6.16 IC6.17 IC6.18 IC6.19 IC6.21 IC6.22 IC6.23 IC6.24 IC6.28 IC6.30 IC6.31 IC6.32 IC6.33 IC6.34 IC6.35 IC6.38 IC6.39 IC6.49 IC6.50 IC6.51 IC6.52 LED6.1 RF1.2 USB1.3 USB1.9
copper on no net:
  other v9: 6,9.9 66,9.9
  other v10: 6,38.1 66,38.1

## Polygon pours and split planes (outlines as drawn)
GND on SIG1 "GND_L01_P013" (solid, remove dead copper, pour order 13): 3.3,50.15 68.975,50.15 74.041,45.084 74.041,2.941 69.375,-1.725 3.225,-1.725 -1.981,3.481 -1.981,44.869
NetIC2_34 on SIG1 "NETIC2_34_L01_P010" (solid, pour order 10): 61.849,18.518 61.976,18.645 65.278,18.645 65.634,18.289 65.634,17.68 64.44,16.486 62.865,16.486 61.849,17.502
NetC6_1 on SIG1 "NETC6_1_L01_P007" (solid, pour order 7): 55.905,17.375 56.718,17.375 56.896,17.197 56.896,16.918 56.312,16.334 54.127,16.334 53.823,16.638 53.823,19.051 54.712,19.94 54.712,21.972 55.321,22.582 58.649,22.582 59.309,21.922 59.309,18.061 58.979,17.731 58.649,17.731 58.293,18.086 58.293,19.636 57.887,20.042 57.074,20.042 55.702,18.67 55.702,17.578
NetD3_2 on SIG1 "NETD3_2_L01_P000" (solid, pour order 0): 55.347,28.932 60.884,28.932 61.722,28.094 61.722,23.42 61.392,23.09 55.27,23.09 54.737,23.623 54.737,28.322
NetIC2_47 on SIG1 "NETIC2_47_L01_P009" (solid, pour order 9): 62.23,24.639 62.586,24.995 63.627,24.995 64.008,24.614 64.008,22.023 63.678,21.693 61.087,21.693 60.655,21.261 60.655,20.093 60.325,19.763 59.868,19.763 59.588,20.042 59.588,22.303 60.147,22.861 61.951,22.861 62.23,23.141
NetC7_1 on SIG1 "NETC7_1_L01_P004" (solid, pour order 4): 56.693,34.266 57.15,34.723 59.944,34.723 61.087,35.866 61.087,37.212 61.493,37.619 63.017,37.619 63.906,36.73 63.906,34.622 64.059,34.469 64.491,34.469 64.77,34.19 64.77,32.082 64.338,31.65 57.531,31.65 56.693,32.488
NetD1_2 on SIG1 "NETD1_2_L01_P005" (solid, pour order 5): 56.667,39.371 57.302,40.006 59.944,40.006 60.554,39.397 60.554,36.044 59.944,35.434 57.277,35.434 56.667,36.044
GND on GND1 "GND_L02_P011" (solid, remove dead copper, pour order 11): 2.921,49.684 70.917,49.684 76.784,43.816 76.784,4.294 69.774,-2.716 2.997,-2.716 -4.597,4.878 -4.597,42.165
GND on GND2 "GND_L05_P012" (solid, remove dead copper, pour order 12): 1.041,50.624 71.298,50.624 79.248,42.673 79.248,4.319 70.231,-4.698 1.651,-4.698 -5.563,2.516 -5.563,44.02
GND on SIG3 "GND_L06_P017" (solid, remove dead copper, pour order 17): 0.635,52.046 72.034,52.046 78.308,45.772 78.308,2.592 71.095,-4.621 1.575,-4.621 -5.74,2.694 -5.74,45.671

## Other copper
SIG1:
  pour cut-out: 5.918,50.346 25.959,50.346 25.959,48.212 19.355,41.608 12.548,41.608 5.918,48.238
GND1:
  pour cut-out: 5.918,50.346 25.959,50.346 25.959,48.212 19.355,41.608 12.548,41.608 5.918,48.238
GND2:
  pour cut-out: 5.918,50.346 25.959,50.346 25.959,48.212 19.355,41.608 12.548,41.608 5.918,48.238
SIG3:
  pour cut-out: 5.918,50.346 25.959,50.346 25.959,48.212 19.355,41.608 12.548,41.608 5.918,48.238

## Silkscreen, mask and mechanical layers (free items; w line width, h text height)
Top Overlay:
  drawing of 4 lines, arcs and shapes, not listed
  text "designer|李家乐" at 8.118,35.048 h1.52
  text "拆开干嘛？" at 31.75,27.146 h2
Top Solder:
  the board outline again, w2.4
Mechanical 1:
  the board outline again, w0.762

## Text inside footprints (layer, text, board x,y; h text height)
RF1: Top Overlay "C3" at 14.991,45.819 h0.5